# Altium PCB SolarArrayTop.PcbDoc
Units mm, origin at the board's own origin, x right, y up, seen from the top; angles counter-clockwise.
Board outline 94 x 94 mm, 2 copper layers (Top Layer, Bottom Layer), stack 1.567 mm thick; 23 components, 15 nets, 74 pads, 3 vias.
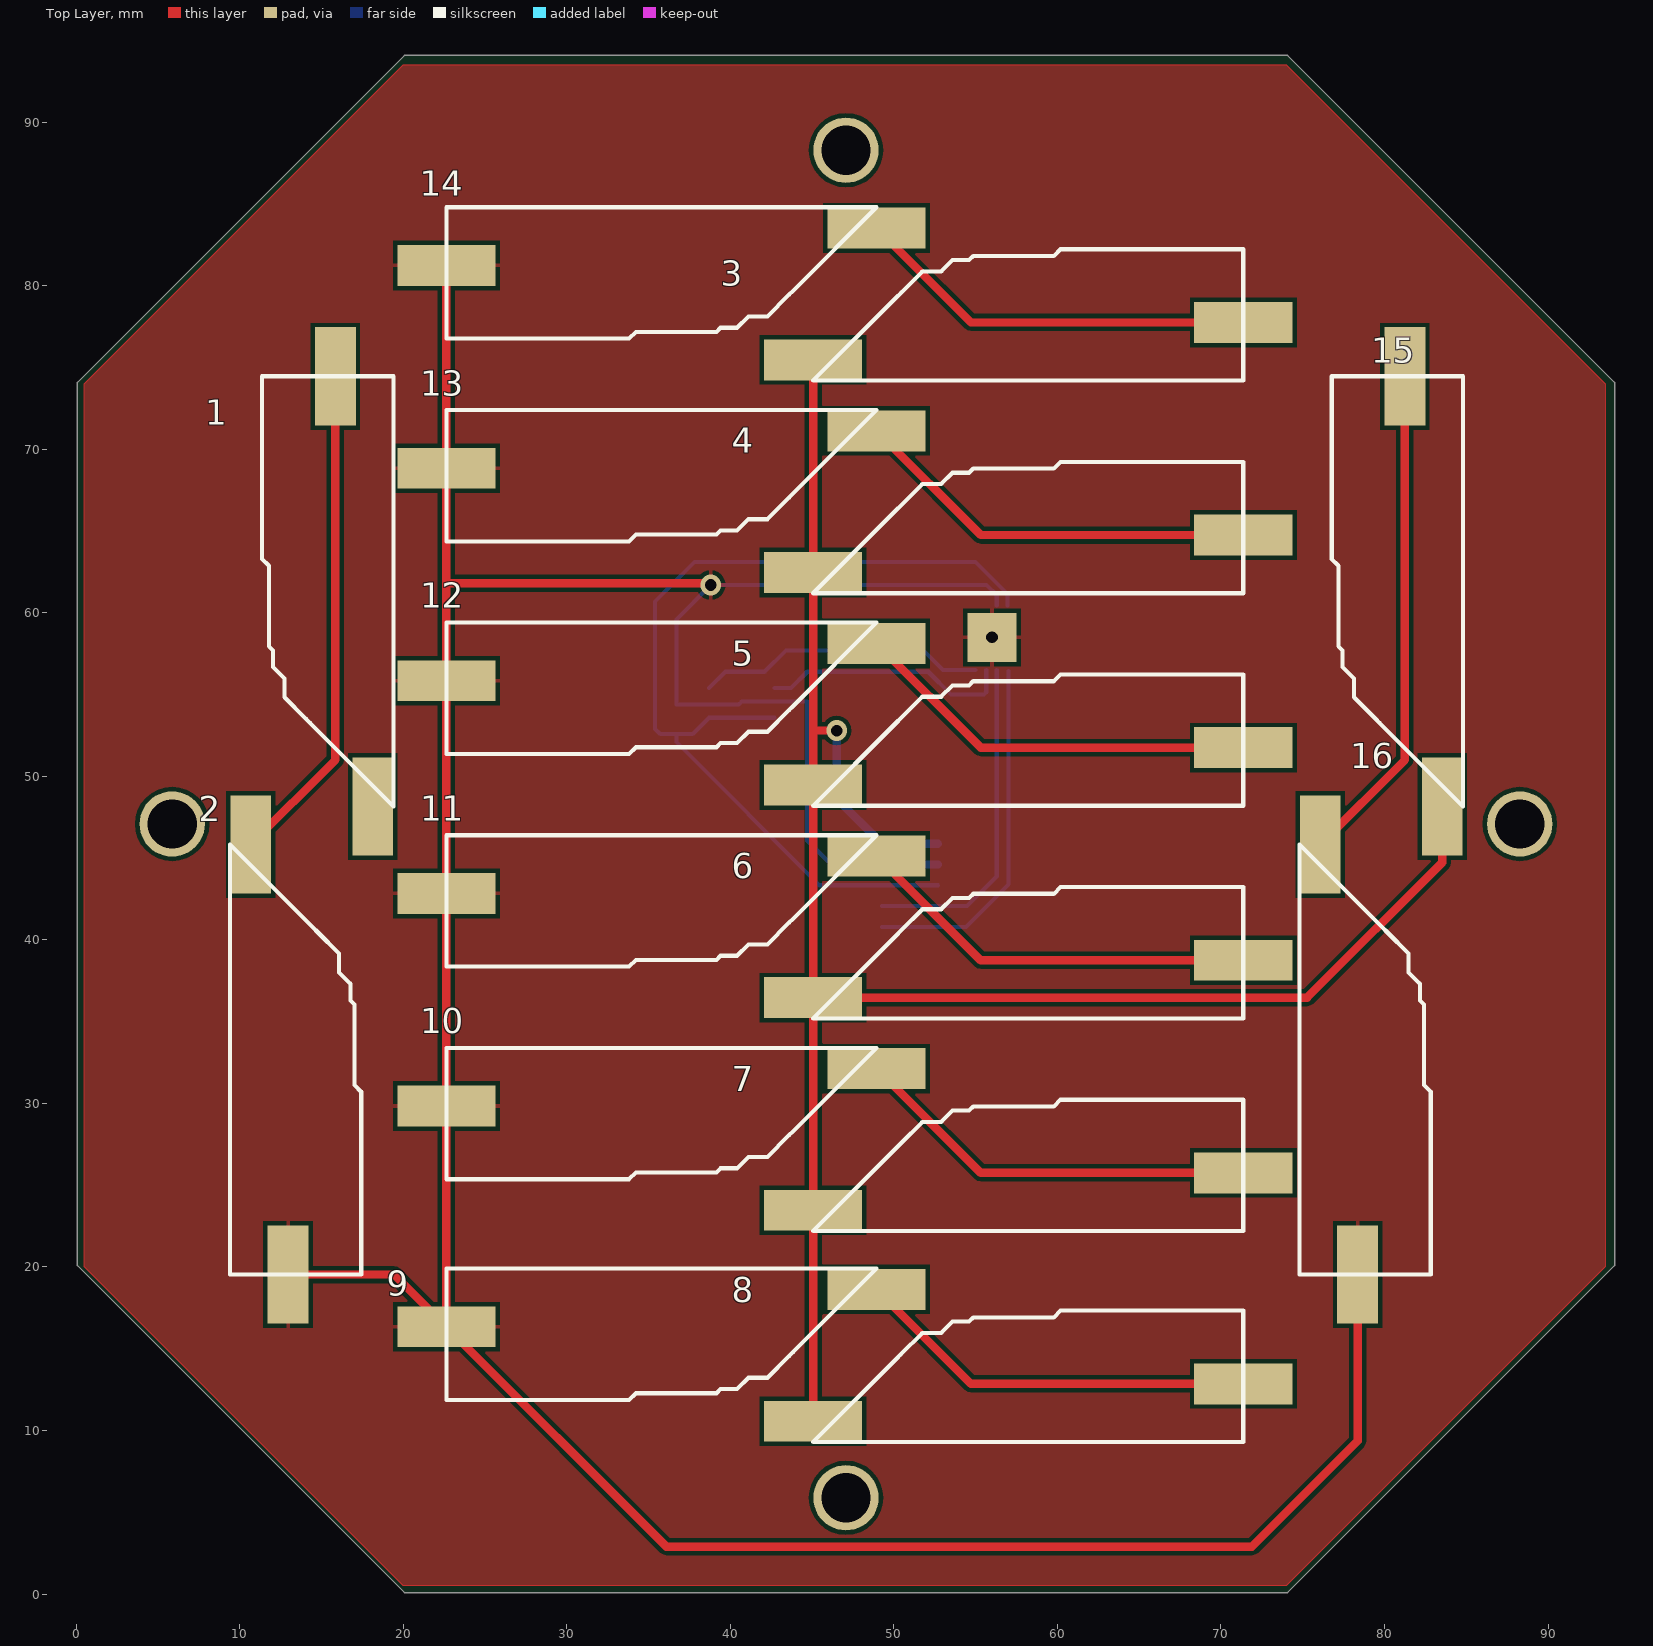
[diagram p0: Top Layer view]
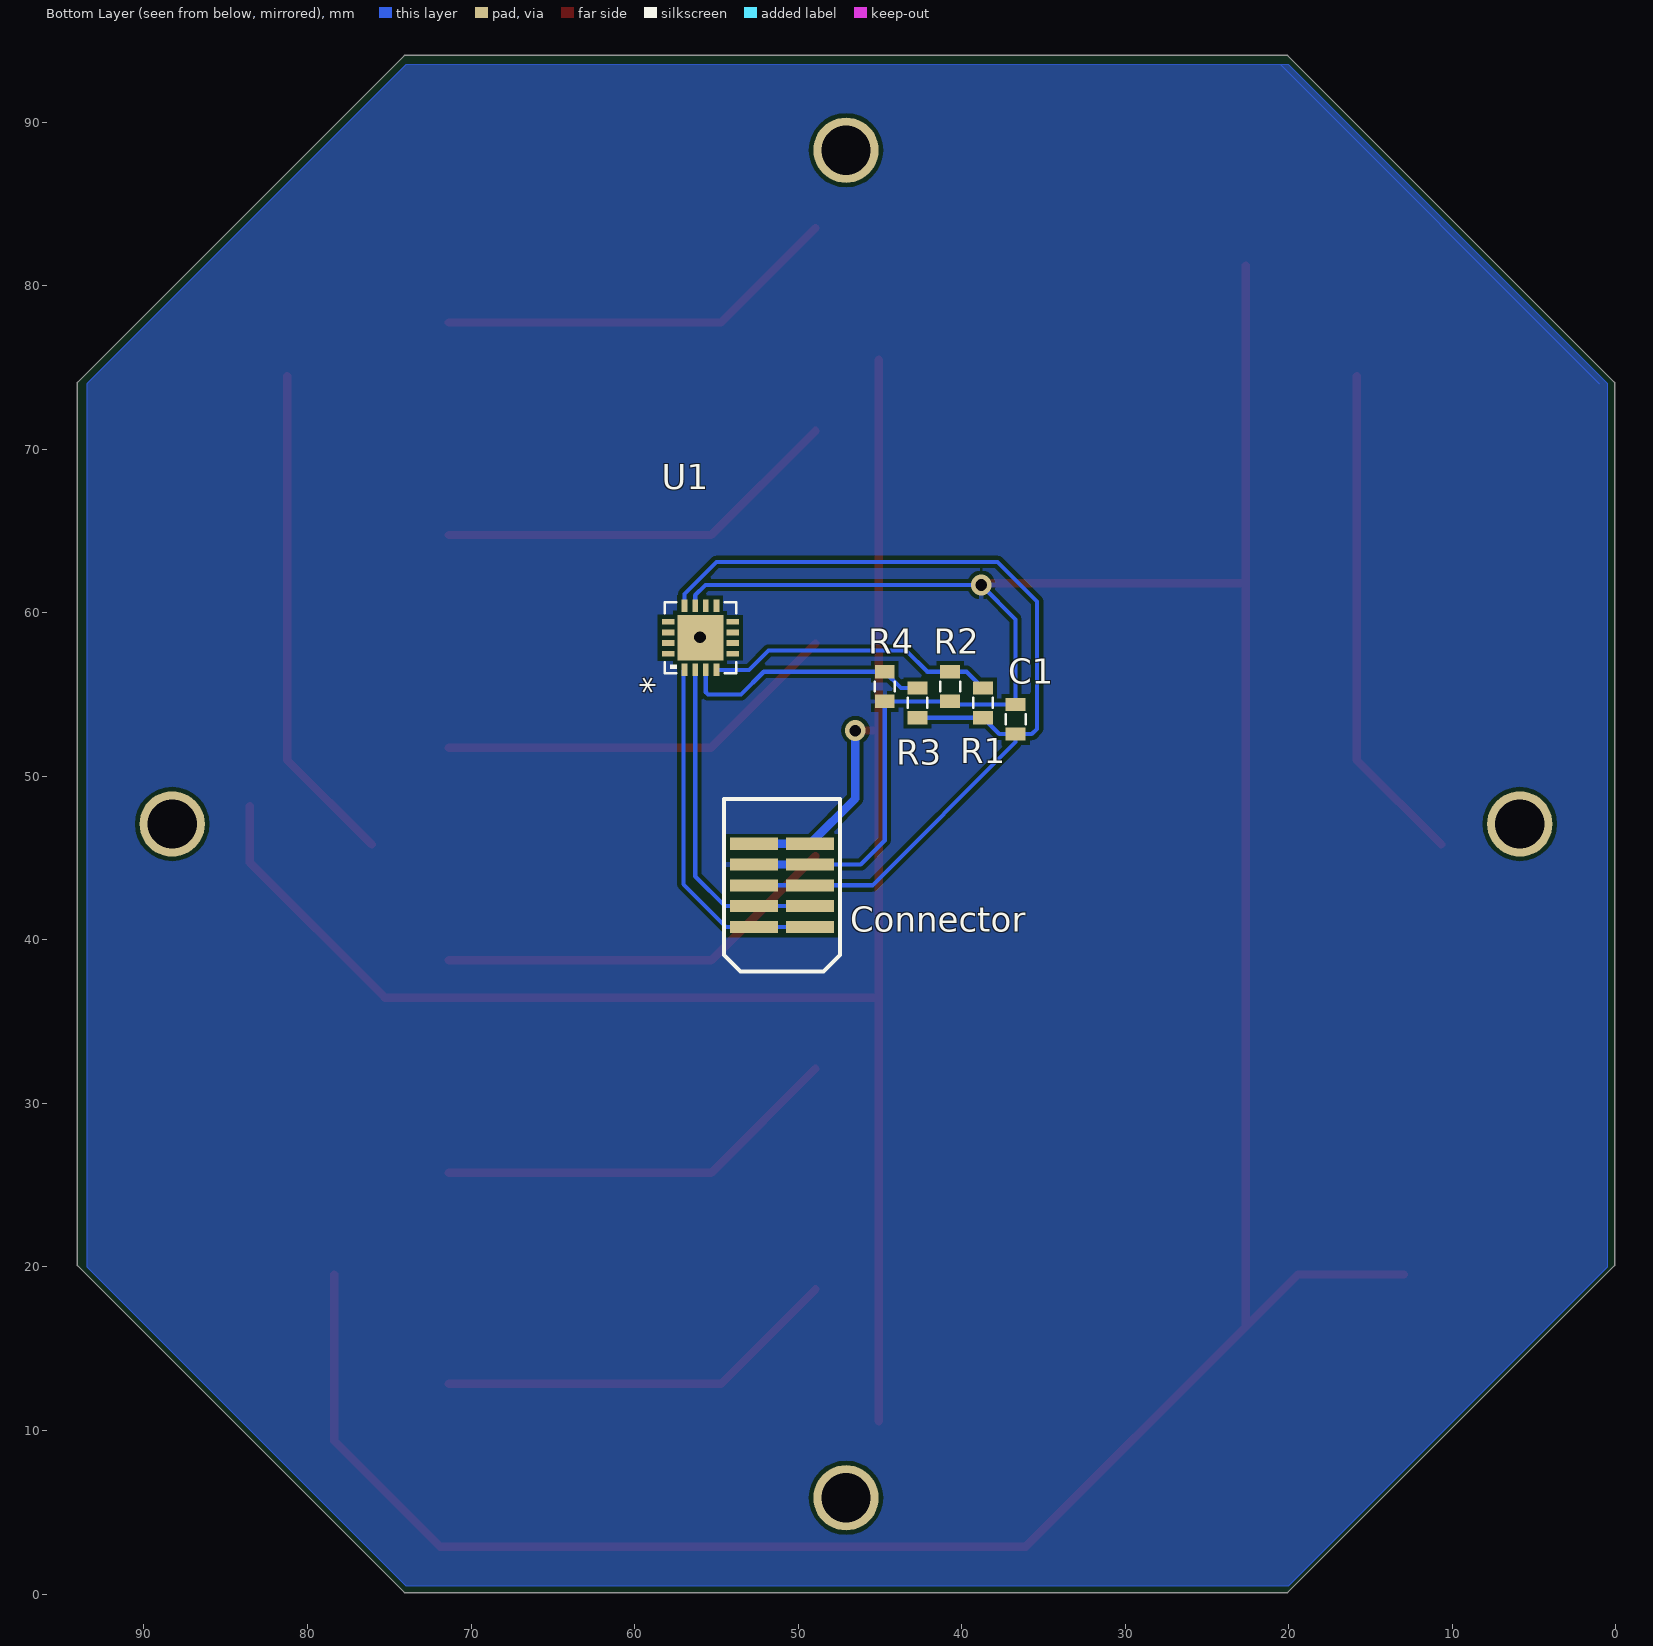
[diagram p1: Bottom Layer view, seen from below]
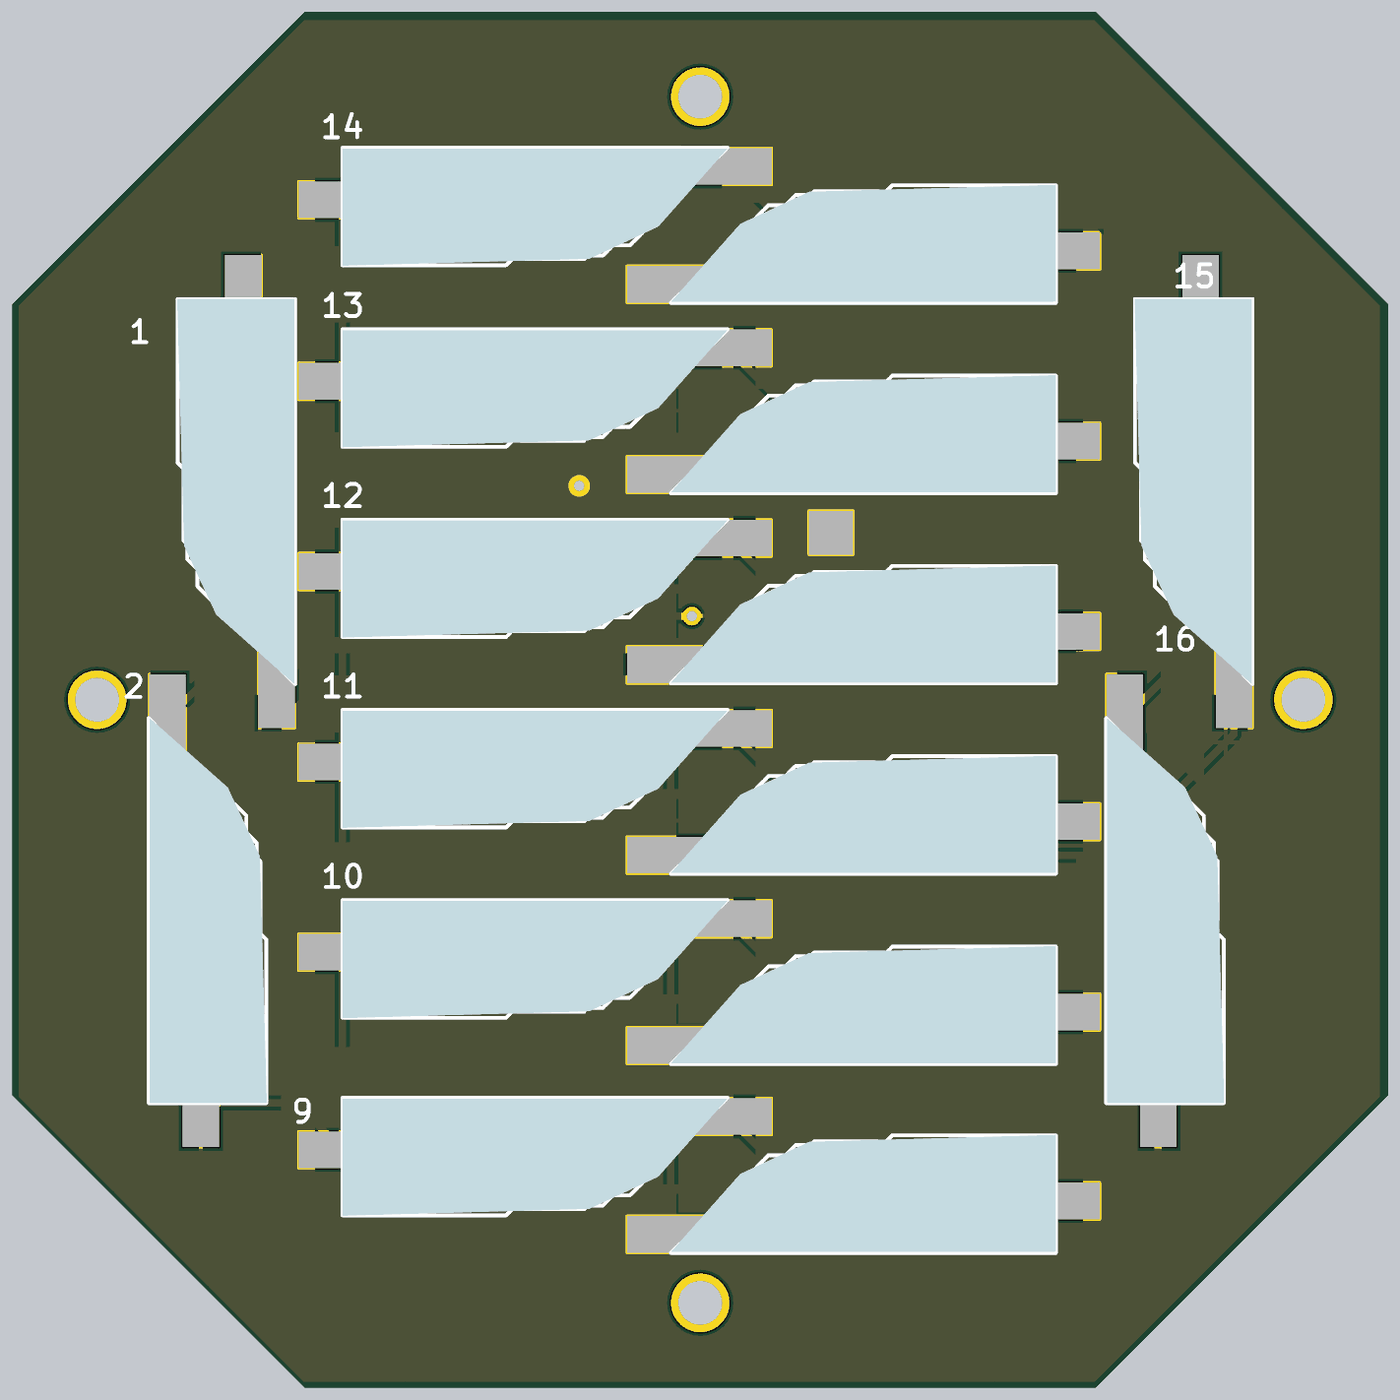
[diagram p2: 3D render of the assembled board from above, using the file's embedded part models]

## Layer stack, top to bottom
Top Solder: solder mask 0.0102, Solder Resist, Dk 3.5
Top Layer: signal copper 0.0356
Dielectric 1: dielectric 1.4961, FR-4, Dk 4.8
Bottom Layer: signal copper 0.0356
Bottom Solder: solder mask 0.0102, Solder Resist, Dk 3.5

## Board outline
20.071,94.088 0.071,74.088 0.071,20.088 20.071,0.088 74.071,0.088 94.071,20.088 94.071,74.088 74.071,94.088

## Design rules (kind name [scope] priority, off if disabled: settings)
Clearance [All] p1: gap=0.254 ignorepadtopadclearanceinfootprint=FALSE except(0: Arc-Hole Track-Hole SMDPad-Hole THPad-Hole Via-Hole Fill-Hole Poly-Hole Region-Hole Text-Hole)
PolygonConnect [All] p1: connectstyle=Relief reliefconductorwidth=0.254 reliefentries=4 polygonreliefangle="90 Angle" airgapwidth=0.254
RoutingVias [All] p1: holewidth=0.711 width=1.27 viastyle="Through Hole" minholewidth=0.711 minwidth=1.27 maxholewidth=0.711 maxwidth=1.27
SolderMaskExpansion [All] p1: expansion=0.102
Width [All] p1: maxlimit=1 minlimit=0.254 preferedwidth=0.254 minimp=50.000000 maximp=50.000000 favimp=50.000000
30 further rules are at their usual default settings.

## Components (designator, comment, footprint, x,y, rotation, side; value= is the part's Value field where it differs from the comment)
1 "Trisol X Solar Wing" PCBComponent_1 19.4,45 r90 top
2 "Trisol X Solar Wing" PCBComponent_1 9.4,49 r270 top
3 "Trisol X Solar Wing" PCBComponent_1 41.9,74.2 r0 top
4 "Trisol X Solar Wing" PCBComponent_1 41.9,61.2 r0 top
5 "Trisol X Solar Wing" PCBComponent_1 41.9,48.2 r0 top
6 "Trisol X Solar Wing" PCBComponent_1 41.9,35.2 r0 top
7 "Trisol X Solar Wing" PCBComponent_1 41.9,22.2 r0 top
8 "Trisol X Solar Wing" PCBComponent_1 41.9,9.3 r0 top
9 "Trisol X Solar Wing" PCBComponent_1 52.1,19.9 r180 top
10 "Trisol X Solar Wing" PCBComponent_1 52.1,33.4 r180 top
11 "Trisol X Solar Wing" PCBComponent_1 52.1,46.4 r180 top
12 "Trisol X Solar Wing" PCBComponent_1 52.1,59.4 r180 top
13 "Trisol X Solar Wing" PCBComponent_1 52.1,72.4 r180 top
14 "Trisol X Solar Wing" PCBComponent_1 52.1,84.8 r180 top
15 "Trisol X Solar Wing" PCBComponent_1 84.8,45 r90 top
16 "Trisol X Solar Wing" PCBComponent_1 74.8,49 r270 top
C1 "100pF" 0805 36.7,53.5 r270 bottom
Connector "TFC-105-02-F-D" TFC-105-X2-XX-D 50.985,43.34 r270 bottom
R1 "1K" 0805 38.7,54.5 r270 bottom
R2 "1K" 0805 40.7,55.5 r270 bottom
R3 "1K" 0805 42.7,54.5 r270 bottom
R4 "1K" 0805 44.7,55.5 r270 bottom
U1 "ADT7420UCPZ-R2" CP_16_17 55.969,58.475 r90 bottom

## Footprints (in the part's own frame and the unit in brackets; to place one, negate y for a bottom-side part, rotate by r counter-clockwise, add the part's x,y. Pads: shape width x height; smd on the part's side, far side on the other; paste and mask are expansions set on the pad)
0805 [mil]
  rect 32x48 smd: 1(-35.43,0) 2(36,0)
  silkscreen extent -12,-24 12,24
CP_16_17 [mil]
  rect 30x14 smd: 1(-77.5,38.39) 2(-77.5,12.8) 3(-77.5,-12.8) 4(-77.5,-38.39) 9(77.5,-38.39) 10(77.5,-12.8) 11(77.5,12.8) 12(77.5,38.39)
  rect 14x30 smd: 5(-38.39,-77.5) 6(-12.8,-77.5) 7(12.8,-77.5) 8(38.39,-77.5) 13(38.39,77.5) 14(12.8,77.5) 15(-12.8,77.5) 16(-38.39,77.5)
  rect 110x110 smd paste-54.5: 17(0,0)
  silkscreen extent -86,-86 86,86, body extent -81,-81 81,81, height 30
PCBComponent_1 [mm]
  rect 6x2.5 smd: 0(3.164,1.27) 1(29.464,3.556)
  silkscreen extent 3.16,0 29.46,8.03, body extent 3.16,0.06 29.46,8.06, height 0.32
TFC-105-X2-XX-D [mil]
  rect 29x115 smd mask+2: 1(-100,-67.5) 2(-100,67.5) 3(-50,-67.5) 4(-50,67.5) 5(0,-67.5) 6(0,67.5) 7(50,-67.5) 8(50,67.5) 9(100,-67.5) 10(100,67.5)
  silkscreen extent -208,-140 208,140, body extent -192,-122 183,113, height 220

## Part data
C1: library part CAP0805_1nF
R1 R2 R3 R4: library part RESISTOR0805-RES_1K
U1: "Imported"

## Free pads (board coordinates)
  round 4 hole 3: 1(5.871,47.088) 1(47.071,5.888) 1(47.071,88.288) 1(88.271,47.088)
  rect 3x3 smd: 2(56,58.5)

## Via types
v1: diameter 1.27, hole 0.711, Top Layer to Bottom Layer, 3 vias

## Nets (pads, with @x,y where several pads share a name; then routed paths per layer and width w, separated by ;. In a path a pad name is that pad's centre, name@x,y a point inside that pad or via, vN(x,y) a via of type N, cw(c..) or ccw(c..) an arc to the next point about the centre after c; other vN are vias at no path point)
Net1_0: 1.0 3.0 4.0 5.0 6.0 7.0 8.0 15.0 Connector.1 Connector.2 | length 123.2
  Top Layer w0.508: 8.0 7.0 6.0 ; 3.0 4.0 45.064,52.8 ; v1(46.5,52.8) 45.064,52.8 ; 15.0 83.53,44.73 75.27,36.47 6.0 ; 6.0 5.0 45.064,52.8
  Bottom Layer w0.508: v1(46.5,52.8) 46.5,48.651 Connector.2 Connector.1
Net1_1: 1.1 2.0 | length 30.8
  Top Layer w0.508: 2.0 15.844,51.01 1.1
Net2_1: 2.1 9.1 10.1 11.1 12.1 13.1 14.1 16.1 C1.1 Connector.3 Connector.4 pad.2 R2.2 R4.2 U1.11 U1.17 | length 218
  Top Layer w0.508: 2.1 19.444,19.536 9.1 ; 14.1 13.1 22.636,61.8 ; v1(38.8,61.7) 38.7,61.8 22.636,61.8 ; 16.1 78.356,9.356 71.9,2.9 36.08,2.9 9.1 ; 9.1 10.1 11.1 12.1 22.636,61.8
  Bottom Layer w0.254: Connector.4 46.17,44.61 44.7,46.08 R4.2 R2.2 40.514,54.4 C1.1 36.7,59.6 v1(38.8,61.7) 55.668,61.7 56.294,61.075 U1.11
  Bottom Layer w0.508: Connector.4 Connector.3
  other v1: 56,58.5
Net3_1: 3.1 14.0 | length 24.8
  Top Layer w0.508: 14.0 54.71,77.756 3.1
Net4_1: 4.1 13.0 | length 25.1
  Top Layer w0.508: 13.0 55.31,64.756 4.1
Net5_1: 5.1 12.0 | length 25.1
  Top Layer w0.508: 12.0 55.31,51.756 5.1
Net6_1: 6.1 11.0 | length 25.1
  Top Layer w0.508: 11.0 55.31,38.756 6.1
Net7_1: 7.1 10.0 | length 25.1
  Top Layer w0.508: 10.0 55.31,25.756 7.1
Net8_1: 8.1 9.0 | length 24.8
  Top Layer w0.508: 9.0 54.71,12.856 8.1
Net15_1: 15.1 16.0 | length 30.8
  Top Layer w0.508: 16.0 81.244,51.01 15.1
NetC1_2: C1.2 Connector.5 Connector.6 R1.2 R3.2 U1.12 | length 59.8
  Bottom Layer w0.254: R3.2 R1.2 37.7,52.586 C1.2 ; Connector.5 Connector.6 45.46,43.34 36.7,52.1 C1.2 ; U1.12 56.944,61.156 55,63.1 37.8,63.1 35.4,60.7 35.4,52.9 35.714,52.586 C1.2
NetConnector_7: Connector.7 Connector.8 U1.2 | length 20.4
  Bottom Layer w0.254: Connector.8 Connector.7 54.47,42.07 56.294,43.894 U1.2
NetConnector_9: Connector.9 Connector.10 U1.1 | length 21.9
  Bottom Layer w0.254: Connector.10 Connector.9 54.4,40.8 57,43.4 U1.1@57,56.45
NetR1_1: R1.1 R2.1 U1.4 | length 17.7
  Bottom Layer w0.254: R1.1 39.7,56.4 R2.1 42.1,56.4 43.4,57.7 51.8,57.7 52.994,56.506 U1.4
NetR3_1: R3.1 R4.1 U1.3 | length 15.4
  Bottom Layer w0.254: R3.1 43.7,55.4 R4.1 52.1,56.4 53.5,55 55.5,55 55.644,55.144 U1.3
pads on no net: U1.5 U1.6 U1.7 U1.8 U1.9 U1.10 U1.13 U1.14 U1.15 U1.16

## Polygon pours and split planes (outlines as drawn)
Net2_1 on Bottom Layer (solid, pour order 8): 20,93.5 74,93.5 93.5,74 93.5,20 74,0.5 20,0.5 0.5,20 0.5,74
Net2_1 on Bottom Layer "Array_neg" (solid, shelved, pour order 2): 1,74 20.5,93.5 74,93.5 93.5,74 93.5,20 74,0.5 20,0.5 0.5,20 0.5,74 20,93.5 20.5,93.5
Net2_1 on Top Layer (solid, pour order 6): 20,93.5 74,93.5 93.5,74 93.5,20 74,0.5 20,0.5 0.5,20 0.5,74
Net1_0 on Top Layer "Array_pos" (solid, shelved, pour order 4): 0.5,74 20,93.5 74,93.5 93.5,74 93.5,20 74,0.5 20,0.5 0.5,20 0.5,74

## Text inside footprints (layer, text, board x,y; h text height)
Connector: Mechanical 1 "J1" at 55.761,43.786 h0.76 r90
U1: Bottom Overlay "*" at 58.128,55.046 h1.52 r270